# Altium PCB PCB_WallSwitch_TOP.PcbDoc
Units mm, origin at the board's own origin, x right, y up, seen from the top; angles counter-clockwise.
Board outline 70 x 47 mm, 2 copper layers (Top Layer, Bottom Layer), stack 1.67 mm thick; 28 components, 35 nets, 137 pads, 14 vias.
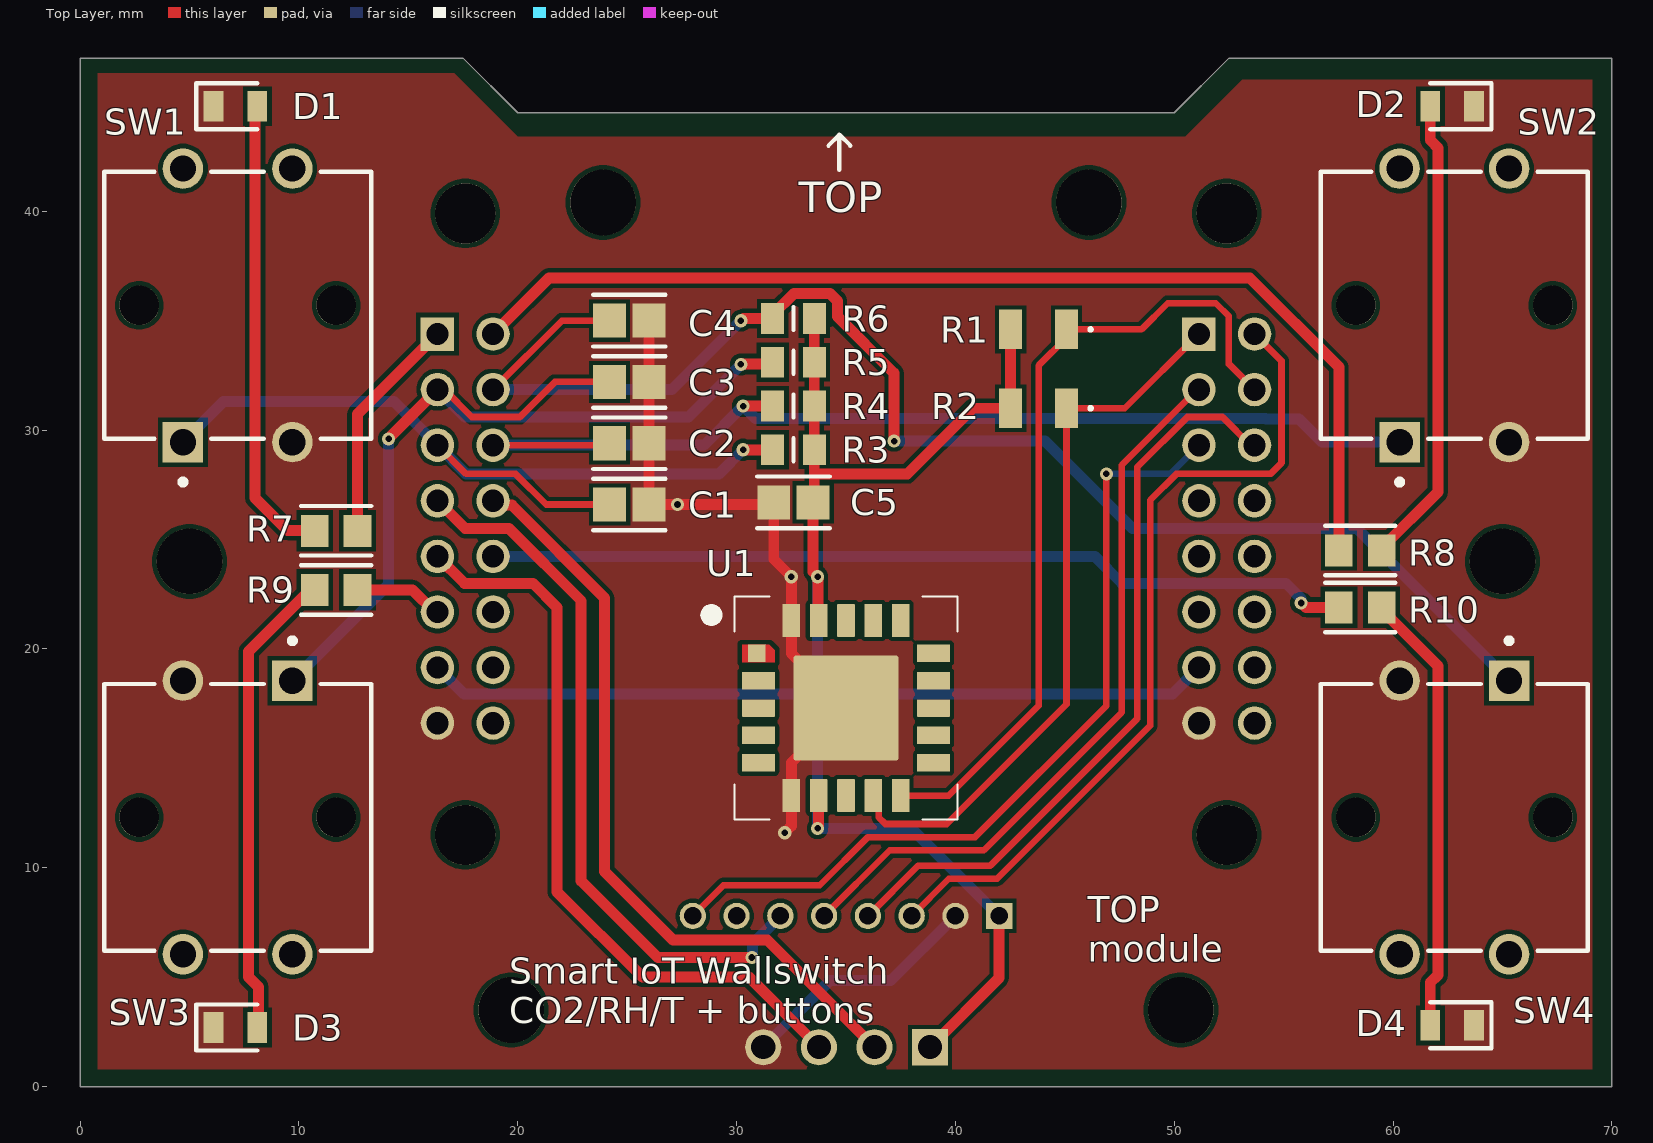
[diagram p0: Top Layer view]
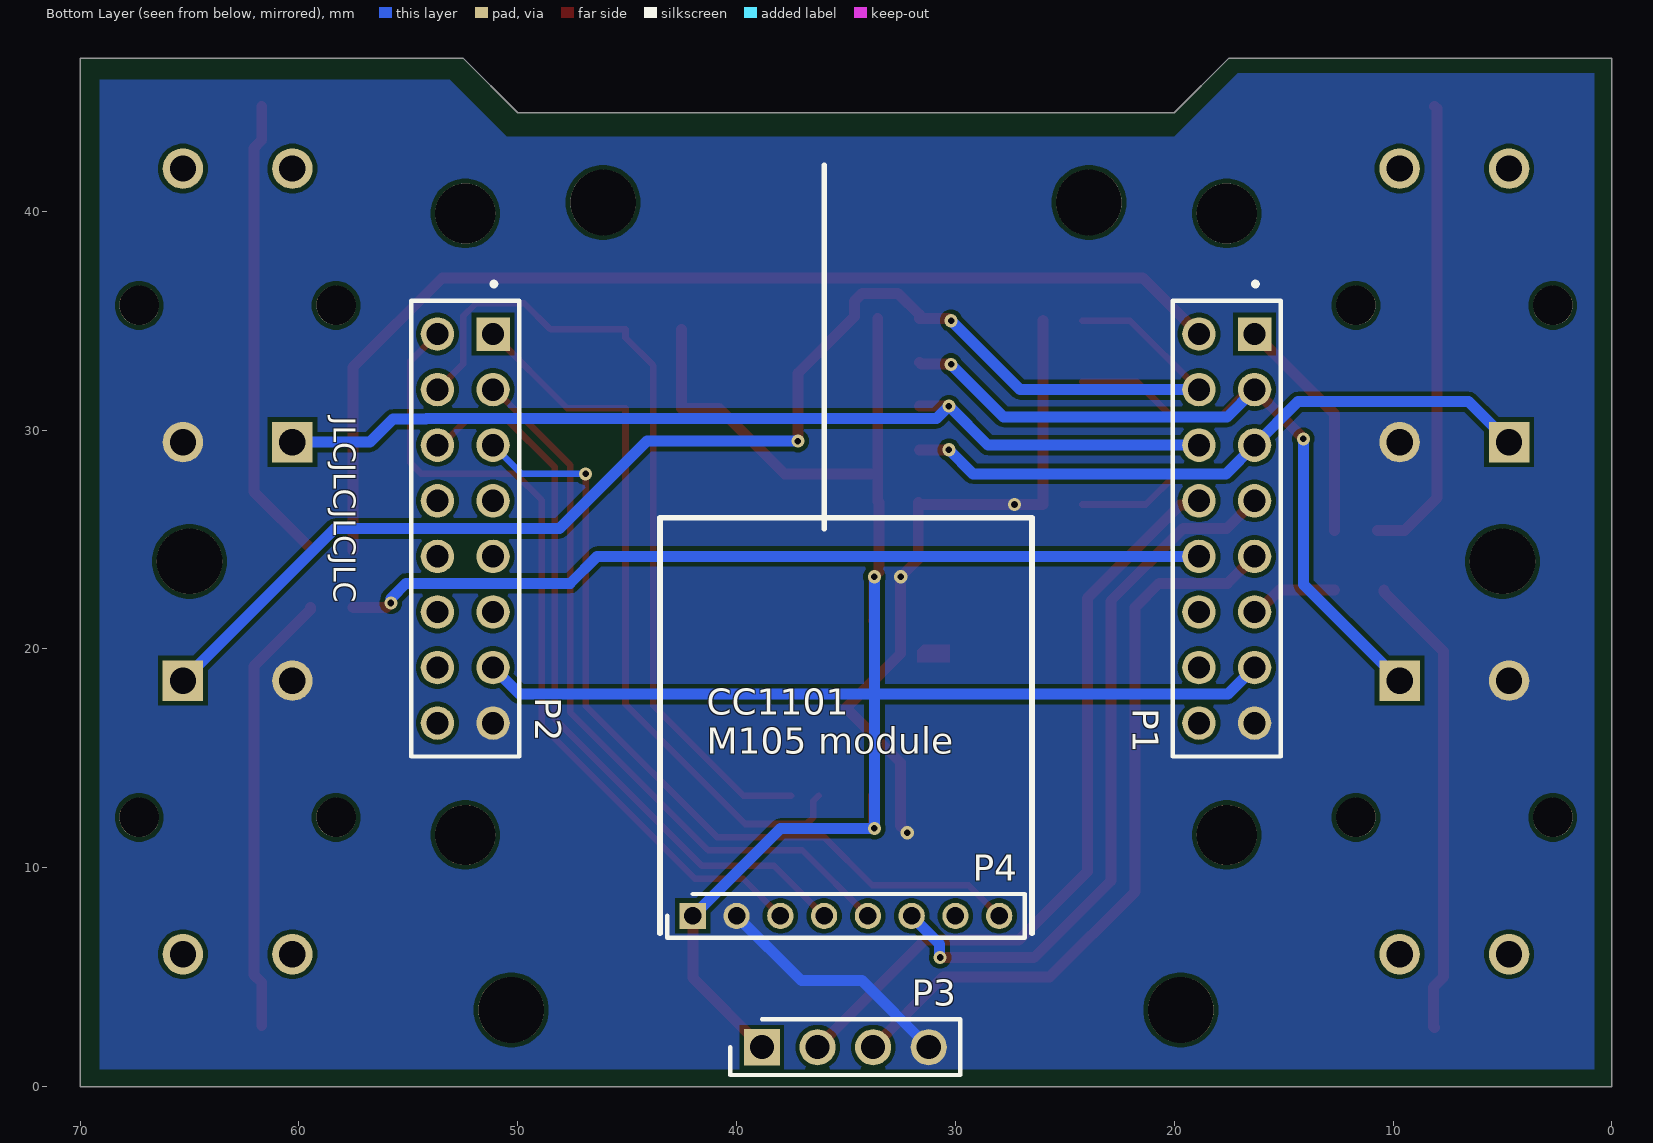
[diagram p1: Bottom Layer view, seen from below]
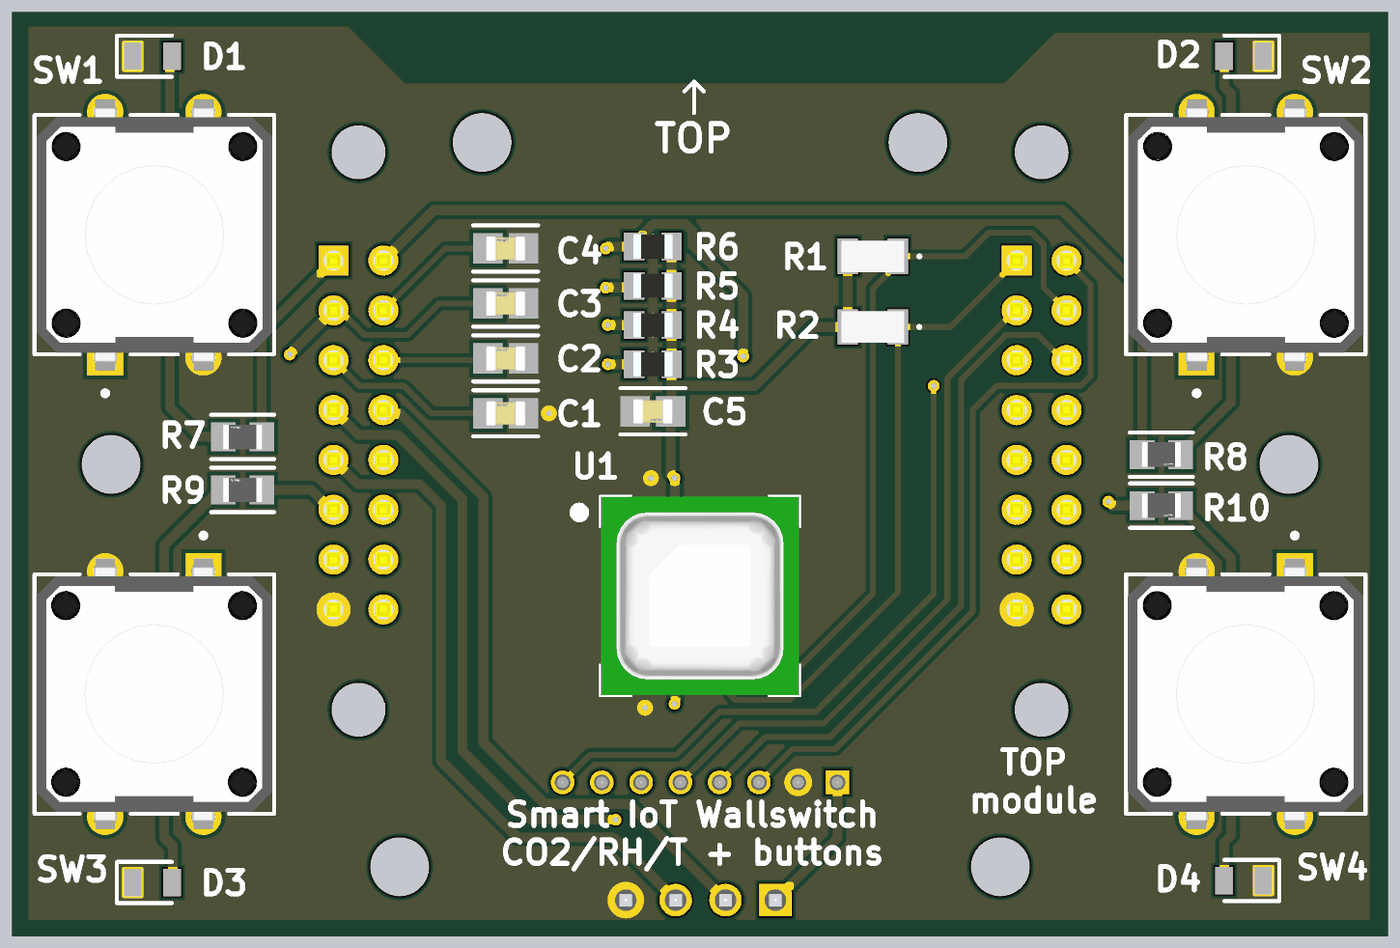
[diagram p2: 3D render of the assembled board from above, using the file's embedded part models]
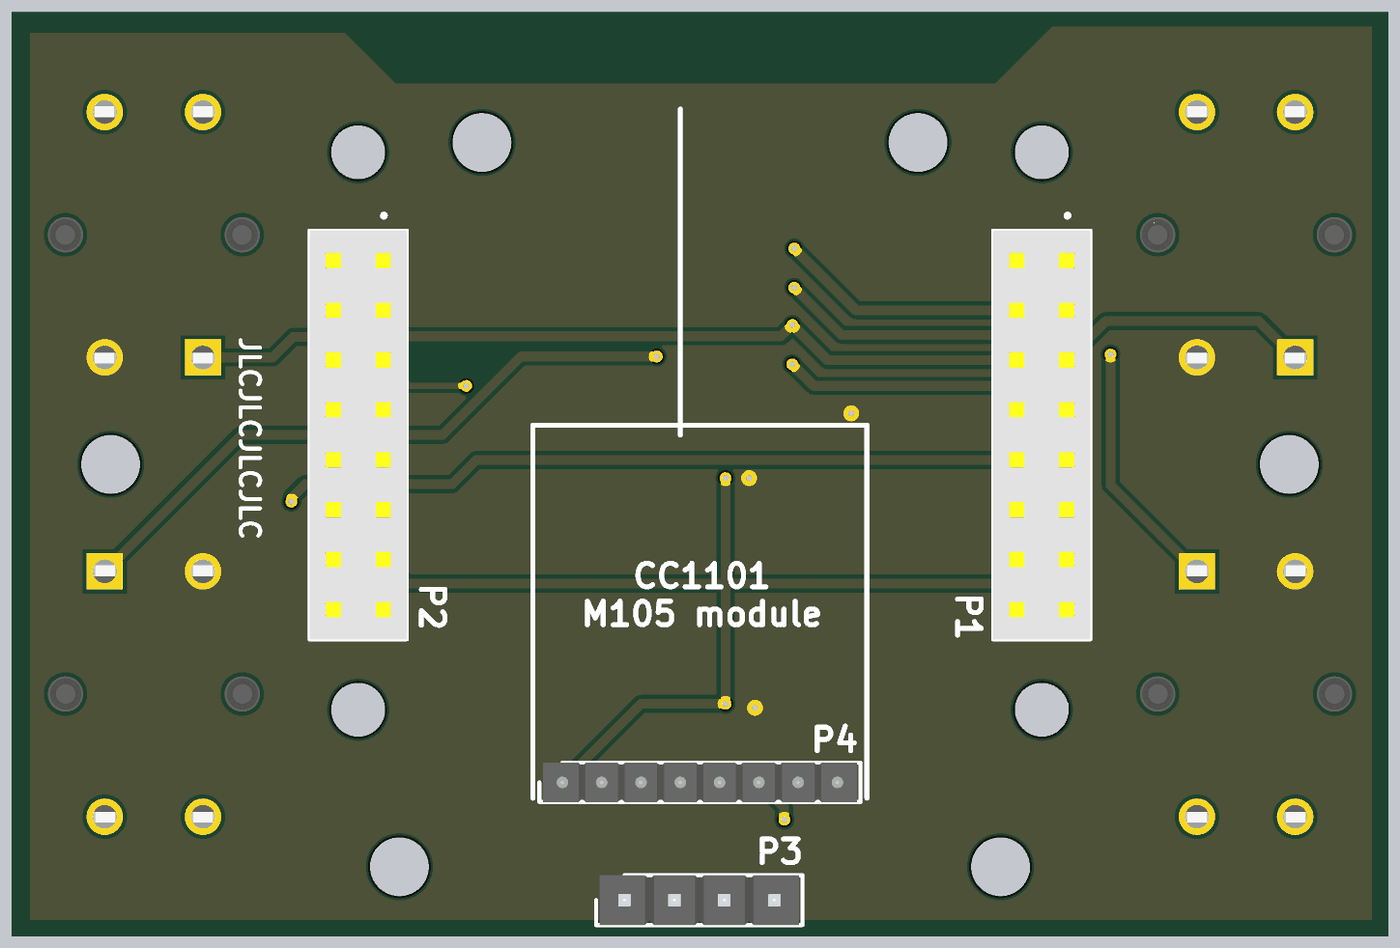
[diagram p3: 3D render of the assembled board from below, using the file's embedded part models]

## Layer stack, top to bottom
Top Solder: solder mask 0.0102, Solder Resist, Dk 3.5
Top Layer: signal copper 0.035
Dielectric 1: dielectric 1.6, FR-4, Dk 4.8
Bottom Layer: signal copper 0.035
Bottom Solder: solder mask 0.0102, Solder Resist, Dk 3.5

## Board outline
0,0 0,47 17.5,47 20,44.5 50,44.5 52.5,47 70,47 70,0

## Design rules (kind name [scope] priority, off if disabled: settings)
BoardOutlineClearance [All] p1: gap=0.2 ignorepadtopadclearanceinfootprint=FALSE except(0.4: Arc-SplitBarrior Arc-SplitContinuation Track-SplitBarrior Track-SplitContinuation SMDPad-SplitBarrior SMDPad-SplitContinuation THPad-SplitBarrior THPad-SplitContinuation Via-SplitBarrior Via-SplitContinuation Fill-SplitBarrior Fill-SplitContinuation Poly-SplitBarrior Poly-SplitContinuation Region-SplitBarrior Region-SplitContinuation Text-SplitBarrior Text-SplitContinuation)
Clearance "Clearance Bottom Layer" [OnLayer('Bottom Layer')] p1: gap=0.2 ignorepadtopadclearanceinfootprint=TRUE except(0.254: Arc-Text Track-Text SMDPad-Text THPad-Text Via-Text Fill-Text Poly-Text Region-Text Text-Text)
Clearance "Clearance Top Layer" [OnLayer('Top Layer')] p2: gap=0.2 ignorepadtopadclearanceinfootprint=TRUE except(0.254: Arc-Text Track-Text SMDPad-Text THPad-Text Via-Text Fill-Text Poly-Text Region-Text Text-Text)
Clearance [All] p3: gap=0.2 ignorepadtopadclearanceinfootprint=FALSE except(0.089: Arc-Arc Arc-Track Arc-SMDPad Track-Track Track-SMDPad SMDPad-SMDPad; 0.127: Arc-Via Track-Via SMDPad-Via THPad-Via Via-Via; 0.254: Arc-Text Track-Text SMDPad-Text THPad-Text Via-Text Fill-Text Poly-Text Region-Text Text-Text)
HoleSize [All] p1: absolutevalues=TRUE maxlimit=6.3 minlimit=0.2 maxpercent=80.000 minpercent=20.000
MinimumAnnularRing [All] p1: minimumring=0.076
MinimumSolderMaskSliver [All] p1: minsoldermaskwidth=0.1
PlaneConnect [All] p1: planeconnectstyle=Direct reliefexpansion=0.508 reliefentries=4 reliefconductorwidth=0.254 reliefairgap=0.254
PolygonConnect PolygonConnect_1 [All] p1: connectstyle=Direct reliefconductorwidth=0.508 reliefentries=4 polygonreliefangle="90 Angle" airgapwidth=0.254
RoutingCorners [All] p1: cornerstyle=Round minsetback=2.54 maxsetback=2.54
RoutingVias [All] p1: holewidth=0.5 width=1 viastyle="Through Hole" minholewidth=0.2 minwidth=0.45 maxholewidth=1 maxwidth=2
SilkToSilkClearance [All] p1: silktosilkclearance=0.1
SilkToSolderMaskClearance [IsPad] p1: minsilkscreentomaskgap=0.1 clearancetoexposedcopper=TRUE
SolderMaskExpansion [All] p1: expansion=0.102 istentingtop=FALSE
Width [All] p1: maxlimit=2.54 minlimit=0.089 preferedwidth=0.381
24 further rules are at their usual default settings.

## Components (designator, comment, footprint, x,y, rotation, side; value= is the part's Value field where it differs from the comment)
C1 "C0805C104K5RAC7411" FP-C0805C-DN-IPC_A 25.101,26.6 r0 top
C2 "C0805C104K5RAC7411" FP-C0805C-DN-IPC_A 25.1,29.4 r0 top
C3 "C0805C104K5RAC7411" FP-C0805C-DN-IPC_A 25.1,32.2 r0 top
C4 "C0805C104K5RAC7411" FP-C0805C-DN-IPC_A 25.1,35 r0 top
C5 "C0805C104K5RAC7411" FP-C0805C-DN-IPC_A 32.6,26.7 r180 top
D1 "IN-S85AT5B" LEDC2012X110N 7.1,44.8 r0 top
D2 "IN-S85AT5B" LEDC2012X110N 62.7,44.8 r180 top
D3 "IN-S85AT5B" LEDC2012X110N 7.1,2.7 r0 top
D4 "IN-S85AT5B" LEDC2012X110N 62.7,2.8 r180 top
P1 "SSQ-108-01-T-D" SAMTEC_SSQ-108-XX-X-D 17.6,25.5 r90 bottom
P2 "SSQ-108-01-T-D" SAMTEC_SSQ-108-XX-X-D 52.4,25.5 r90 bottom
P3 "M20-9770446" HDRV4W64P0X254_1X4_1016X254X834P 38.84,1.8 r180 bottom
P4 "M22-2010805" HDRV8W60P0X200_1X8_1600X200X525P 42,7.8 r180 bottom
R1 "RCC12062K20FKEA" RCC1206_e3 43.8,34.6 r180 top
R2 "RCC12062K20FKEA" RCC1206_e3 43.8,31 r180 top
R3 "ERJ-UP6J103V" RESC2012X70N 32.6,29.1 r180 top
R4 "ERJ-UP6J103V" RESC2012X70N 32.6,31.1 r180 top
R5 "ERJ-UP6J103V" RESC2012X70N 32.6,33.1 r180 top
R6 "ERJ-UP6J103V" RESC2012X70N 32.6,35.1 r180 top
R7 "ESR10EZPJ820" FP-ESR10-IPC_A 11.7,25.4 r0 top
R8 "ESR10EZPJ820" FP-ESR10-IPC_A 58.5,24.5 r180 top
R9 "ESR10EZPJ820" FP-ESR10-IPC_A 11.7,22.7 r0 top
R10 "ESR10EZPJ820" FP-ESR10-IPC_A 58.5,21.9 r180 top
SW1 "B3F-4000" FP-B3F-4000-MFG 7.2,35.7 r90 top
SW2 "B3F-4000" FP-B3F-4000-MFG 62.8,35.7 r90 top
SW3 "B3F-4000" FP-B3F-4000-MFG 7.2,12.3 r270 top
SW4 "B3F-4000" FP-B3F-4000-MFG 62.8,12.3 r270 top
U1 "SCD40-D-R2" SCD4x 35,17.3 r0 top

## Footprints (in the part's own frame and the unit in brackets; to place one, negate y for a bottom-side part, rotate by r counter-clockwise, add the part's x,y. Pads: shape width x height; smd on the part's side, far side on the other; paste and mask are expansions set on the pad)
FP-B3F-4000-MFG [mm]
  rect 1.85x1.85 hole 1.2 paste-1000 mask+0: 1(-6.25,2.5)
  round 1.85 hole 1.2 paste-1000 mask+0: 2(6.25,2.5) 3(-6.25,-2.5) 4(6.25,-2.5)
  round 1.8 hole 1.8 unplated paste-1000 mask+0: ""(0,4.5) ""(0,-4.5)
  silkscreen extent -8.2,-6.1 6.1,6.1, body extent -7.27,-6.2 7.27,6.2, height 0.25
FP-C0805C-DN-IPC_A [mm]
  rect 1.505x1.556 smd paste+0 mask+0: 1(-0.901,0) 2(0.901,0)
  silkscreen extent -1.65,-1.18 1.65,1.18, body extent -2.15,-1.28 2.15,1.28, height 0.25
FP-ESR10-IPC_A [mm]
  rect 1.258x1.462 smd paste+0 mask+0: 1(-0.977,0) 2(0.977,0)
  silkscreen extent -1.61,-1.13 1.61,1.13, body extent -2.11,-1.23 2.11,1.23, height 0.25
HDRV4W64P0X254_1X4_1016X254X834P [mm]
  rect 1.65x1.65 hole 1.1: 1(0,0)
  round 1.65 hole 1.1: 2(2.54,0) 3(5.08,0) 4(7.62,0)
  silkscreen extent -1.45,-1.27 9.07,1.27, body extent -1.27,-1.27 8.89,1.27, height 8.34
HDRV8W60P0X200_1X8_1600X200X525P [mm]
  rect 1.2x1.2 hole 0.8: 1(0,0)
  round 1.2 hole 0.8: 2(2,0) 3(4,0) 4(6,0) 5(8,0) 6(10,0) 7(12,0) 8(14,0)
  silkscreen extent -1.17,-1 15.17,1, body extent -1,-1 15,1, height 5.25
LEDC2012X110N [mm]
  rect 0.9x1.4 smd: 1(-1,0) 2(1,0)
  silkscreen extent -1.8,-1.05 1,1.05
RCC1206_e3 [mm]
  rect 1.05x1.8 smd: 1(-1.275,0) 2(1.275,0)
  silkscreen extent -2.42,-0.05 -2.33,0.05, body extent -1.6,-0.8 1.6,0.8, height 0.55
RESC2012X70N [mm]
  rect 1.05x1.4 smd: 1(-0.95,0) 2(0.95,0)
  silkscreen extent 0,-0.53 0,0.53, body extent -1,-0.63 1,0.63, height 0.7
SAMTEC_SSQ-108-XX-X-D [mm]
  rect 1.53x1.53 hole 1.02: 01(8.89,-1.27)
  round 1.53 hole 1.02: 02(8.89,1.27) 03(6.35,-1.27) 04(6.35,1.27) 05(3.81,-1.27) 06(3.81,1.27) 07(1.27,-1.27) 08(1.27,1.27) 09(-1.27,-1.27) 10(-1.27,1.27) 11(-3.81,-1.27) 12(-3.81,1.27) 13(-6.35,-1.27) 14(-6.35,1.27) 15(-8.89,-1.27) 16(-8.89,1.27)
  silkscreen extent -10.42,-2.47 11.27,2.47, body extent -10.41,-2.48 10.41,2.48, height 8.51
SCD4x [mm] "PQFN, 20-Leads, Body 10.10x10.10mm, Pitch 1.25mm, Thermal Pad 4.80x4.80mm, IPC Medium Density"
  rect 0.8x0.8 smd paste-0.7: 1(-4.075,2.5)
  rrect5% 1.5x0.8 smd paste-0.125: 2(-4,1.25) 3(-4,0) 4(-4,-1.25) 5(-4,-2.5) 11(4,-2.5) 12(4,-1.25) 13(4,0) 14(4,1.25) 15(4,2.5)
  rrect5% 0.8x1.5 smd paste-0.125: 6(-2.5,-4) 7(-1.25,-4) 8(0,-4) 9(1.25,-4) 10(2.5,-4) 16(2.5,4) 17(1.25,4) 18(0,4) 19(-1.25,4) 20(-2.5,4)
  rrect5% 4.8x4.8 smd paste-5 mask+0.1: 21(0,0)
  Top Layer region: -4.75,2.1 -4.75,2.9 -3.5,2.9 -3.25,2.65 -3.25,2.1
  silkscreen extent -6.65,-5.1 5.1,5.1, body extent -5.05,-5.05 5.05,5.05, height 6.28

## Part data
C1 C2 C3 C4 C5: "Cap Ceramic 0.1uF 50V X7R 10% SMD 0805 125°C Paper T/R", Capacitance=100nF, Case/Package=0805, Dielectric=X7R, Dielectric Material=Ceramic, Manufacturer=KEMET, Max Operating Temperature=125°C, Min Operating Temperature=-55°C, Supplier Part Number 1=80-C0805C104K5RACLR, Tolerance=10%, Voltage Rating (DC)=50V, Category="Ceramic Capacitors", ComponentLink1Description=http://components.arrow.com/part/dataview/30748302S8994022N7429?src-supplier=Arrow+Electronics, ComponentLink1URL=http://components.arrow.com/part/dataview/30748302S8994022N7429?src-supplier=Arrow+Electronics, ComponentLink2Description=https://www.verical.com/server-webapp/html/getDatasheet?partID=248513&src-supplier=Verical, ComponentLink2URL=https://www.verical.com/server-webapp/html/getDatasheet?partID=248513&src-supplier=Verical, Construction=Flat, Depth=1.25mm, Height=0.9mm, Length=2mm, Manufacturer Part Number=C0805C104K5RAC7411, Mount="Surface Mount", Packaging="Tape and Reel", Pricing 1="1=0,13000, 10=0,09300, 50=0,09300, 100=0,04400, 500=0,03100, 1000=0,02600, 2500=0,02400, 5000=0,02200, 10000=0,02100, 15000=0,02000 (USD)", Radiation Hardening=No, RoHS=Yes, RoHS Compliant=Yes, Stock 1=1484324, Supplier 1=Mouser
D1 D2 D3 D4: "Led Blue Clear 0805 SMD", Case Code (Imperial)=0805, Case Code (Metric)=2012, Color=Blue, Forward Voltage=3V, Lens Color=Clear, Manufacturer=Inolux, Supplier Part Number 1=743-IN-S85AT5B, Test Current=5mA, Case/Package=0805, Category=LEDs, ComponentLink1Description=http://www.inolux-corp.com/datasheet/SMDLED/Mono%20Color%20Top%20View/IN-S85AT%20Series_V1.0.pdf?src-supplier=Digi-Key, ComponentLink1URL=http://www.inolux-corp.com/datasheet/SMDLED/Mono%20Color%20Top%20View/IN-S85AT%20Series_V1.0.pdf?src-supplier=Digi-Key, Dominant Wavelength=470nm, Height=1.1mm, Length=2mm, Lens Size=1.25mm, Lens Style=Flat, Lens Transparency=Clear, Luminous Intensity=80mcd, Manufacturer Part Number=IN-S85AT5B, Mount="Surface Mount", Packaging="Tape and Reel", Pricing 1="1=0,37000, 10=0,20100, 50=0,20100, 100=0,09300, 1000=0,06800, 10000=0,05100 (USD)", RoHS=No, Stock 1=32542, Supplier 1=Mouser, Viewing Angle=120°, Width=1.25mm
P1 P2: "Headers & Wire Housings Tiger Buy Socket Strip with Square Tails, 0.100 Pitch", Color=Black, Contact Resistance=10mR, Manufacturer=Samtec, Max Current Rating=7.6A, Max Operating Temperature=105°C, Max Voltage Rating (AC)=550V, Min Operating Temperature=-55°C, Supplier Part Number 1=200-SSQ10801TD, Category="Headers and Wire Housings", ComponentLink1Description=https://datasheet.ciiva.com/748/ssq-1xx-xx-xxx-x-xx-xxx-xx-x-mkt-748536.pdf?src-supplier=Digi-Key, ComponentLink1URL=https://datasheet.ciiva.com/748/ssq-1xx-xx-xxx-x-xx-xxx-xx-x-mkt-748536.pdf?src-supplier=Digi-Key, Connector Type=Receptacle, Contact Material=Bronze, Contact Plating=Tin,Matte, Contact Type="Female Socket", Depth=4.95mm, Gender=Female, Housing Color=Black, Housing Material=Polymer, Lead Free="Lead Free", Length=20.83mm, Manufacturer Part Number=SSQ-108-01-T-D, Mount="Through Hole", Number of Contacts=16, Number of Positions=16, Number of Rows=2, Orientation=Straight, Packaging=Bulk, Pitch=2.54mm, Pricing 1="1=2,40000, 10=2,18000, 50=2,18000, 100=1,86000, 500=1,55000, 1000=1,33000, 2500=1,23000, 5000=1,18000, 10000=1,15000, 25000=1,12000 (USD)", RoHS=Yes, RoHS Compliant=Yes, Row Spacing=0.1inch, Series=SSQ, Stock 1=1213, Supplier 1=Mouser, Termination=Solder, Width=4.95mm
P3: "04 SIL VERT PIN HDR", Case/Package=SIL, Color=Black, Contact Resistance=30mR, Current Rating=3A, Manufacturer=Harwin, Max Operating Temperature=105°C, Min Operating Temperature=-40°C, Package Quantity=1000, Supplier Part Number 1=855-M20-9770446, Voltage Rating=750V, Category="Headers and Wire Housings", ComponentLink1Description=https://datasheet.ciiva.com/6832/m20-977-6832936.pdf?src-supplier=Digi-Key, ComponentLink1URL=https://datasheet.ciiva.com/6832/m20-977-6832936.pdf?src-supplier=Digi-Key, Connector Type="Male Pin", Contact Material=Brass, Contact Mating Length=0.228inch, Contact Plating=Tin, Depth=2.54mm, Gender=Male, Housing Color=Black, Housing Material=Nylon, Length=10.16mm, Manufacturer Part Number=M20-9770446, Max Current Rating=3A, Mount="Through Hole", Number of Contacts=4, Number of Positions=4, Number of Rows=1, Orientation=Straight, Packaging=Bulk, Pitch=2.54mm, Pricing 1="1=0,20000, 10=0,15300, 50=0,15300, 100=0,12500, 500=0,11300, 1000=0,09100, 2000=0,08100, 10000=0,07300, 25000=0,06800, 50000=0,06600 (USD)", RoHS=Yes, Stock 1=20888, Supplier 1=Mouser, Termination=Solder
P4: "Connector, Header, 8Pos, 1Row, 2Mm Rohs Compliant: Yes", Case/Package=SIL, Color=Black, Contact Resistance=20mR, Current Rating=1A, Flammability Rating="UL94 V-0", Insulation Resistance=10GR, Manufacturer=Harwin, Max Operating Temperature=105°C, Min Operating Temperature=-55°C, Package Quantity=1000, Supplier Part Number 1=855-M22-2010805, Voltage Rating=650V, Category="Headers and Wire Housings", ComponentLink1Description=https://datasheet.ciiva.com/11751/0900766b800345c0-11751285.pdf?src-supplier=RSComponents, ComponentLink1URL=https://datasheet.ciiva.com/11751/0900766b800345c0-11751285.pdf?src-supplier=RSComponents, ComponentLink2Description=https://datasheet.ciiva.com/9479/m22-201-9479493.pdf?src-supplier=Avnet, ComponentLink2URL=https://datasheet.ciiva.com/9479/m22-201-9479493.pdf?src-supplier=Avnet, ComponentLink3Description=https://datasheet.ciiva.com/6814/m22-201-6814953.pdf?src-supplier=Digi-Key, ComponentLink3URL=https://datasheet.ciiva.com/6814/m22-201-6814953.pdf?src-supplier=Digi-Key, Connector Type="Male Pin", Contact Material=Bronze, Contact Mating Length=0.138inch, Contact Plating=Gold, Contact Type="Male Pin", Depth=2mm, Housing Color=Black, Housing Material=Nylon, Length=16mm, Manufacturer Part Number=M22-2010805, Max Current Rating=1A, Mount="Through Hole", Number of Contacts=8, Number of Positions=8, Number of Rows=1, Orientation=Straight, Packaging=Bulk, Pitch=2mm, Pricing 1="1=0,57000, 10=0,44500, 50=0,44500, 100=0,38500, 1000=0,28800, 10000=0,23600 (USD)", Radiation Hardening=No, REACH SVHC="No SVHC", RoHS=Yes, RoHS Compliant=Yes, Series=M22, Stock 1=686, Supplier 1=Mouser, Termination=Solder
R1 R2: "Res, Aec-Q200, 2K2, 1%, 0.5W, 1206 Rohs Compliant: Yes", Manufacturer=Vishay, Resistance=2.2k, Supplier Part Number 1=71-RCC12062K20FKEA, Category="Chip SMD Resistors", Manufacturer Part Number=RCC12062K20FKEA, Pricing 1="1=0,32000, 10=0,27600, 50=0,27600, 100=0,10800, 250=0,10700, 1000=0,04500, 5000=0,04300, 10000=0,04300 (USD)", RoHS=No, Stock 1=10157, Supplier 1=Mouser
R3 R4 R5 R6: "Res 10K Ohm 5% 1/2W 0805", Manufacturer=Panasonic, Resistance=10K, Supplier Part Number 1=667-ERJ-UP6J103V, Category="Chip SMD Resistors", Manufacturer Part Number=ERJ-UP6J103V, Pricing 1="1=0,16000, 10=0,11900, 50=0,11900, 100=0,05800, 1000=0,02500, 10000=0,02100 (USD)", RoHS=No, Stock 1=46150, Supplier 1=Mouser
R7 R8 R9 R10: "Res Thick Film 0805 82 Ohm 5% 0.4W ±200ppm/C Epoxy Resin Pad SMD Automotive T/R", Case Code (Imperial)=0805, Case Code (Metric)=2012, Manufacturer=Rohm, Max Power Dissipation=400mW, Power Rating=250mW, Resistance=82R, Supplier Part Number 1=755-ESR10EZPJ820, Temperature Coefficient=200ppm/°C, Tolerance=5%, Case/Package=0805, Category="Chip SMD Resistors", ComponentLink1Description=https://datasheet.ciiva.com/2468/esr-2468944.pdf?src-supplier=Digi-Key, ComponentLink1URL=https://datasheet.ciiva.com/2468/esr-2468944.pdf?src-supplier=Digi-Key, ComponentLink2Description=https://datasheet.ciiva.com/16439/esr10ezpd-16439950.pdf?src-supplier=Future+Electronics, ComponentLink2URL=https://datasheet.ciiva.com/16439/esr10ezpd-16439950.pdf?src-supplier=Future+Electronics, Features="Automotive AEC-Q200", Lead Free="Lead Free", Manufacturer Part Number=ESR10EZPJ820, Number of Terminations=2, Packaging="Cut Tape", Pricing 1="1=0,10000, 10=0,08600, 50=0,08600, 100=0,03300, 1000=0,01500, 10000=0,01100 (USD)", RoHS=Yes, RoHS Compliant=Yes, Series=ESR, Size Code=0805, Stock 1=16946, Supplier 1=Mouser
SW1 SW2 SW3 SW4: "SWITCH TACTILE SPST-NO 0.05A 24V", Manufacturer=Omron, Supplier Part Number 1=653-B3F-4000, Category="Tactile Switches", ComponentLink1Description=https://datasheet.ciiva.com/1634/611570-1634130.pdf?src-supplier=Farnell, ComponentLink1URL=https://datasheet.ciiva.com/1634/611570-1634130.pdf?src-supplier=Farnell, ComponentLink2Description=https://datasheet.ciiva.com/2900/b3f-0811-2900015.pdf?src-supplier=Digi-Key, ComponentLink2URL=https://datasheet.ciiva.com/2900/b3f-0811-2900015.pdf?src-supplier=Digi-Key, ComponentLink3Description=https://datasheet.ciiva.com/5283/b3f-0811-26083-5283451.pdf?src-supplier=Mouser, ComponentLink3URL=https://datasheet.ciiva.com/5283/b3f-0811-26083-5283451.pdf?src-supplier=Mouser, ComponentLink4Description=https://datasheet.ciiva.com/14142/b3f-eng-datasheet-14142463.pdf?src-supplier=Distrelec, ComponentLink4URL=https://datasheet.ciiva.com/14142/b3f-eng-datasheet-14142463.pdf?src-supplier=Distrelec, ComponentLink5Description=https://datasheet.ciiva.com/14540/70175371-14540890.pdf?src-supplier=Allied+Electronics, ComponentLink5URL=https://datasheet.ciiva.com/14540/70175371-14540890.pdf?src-supplier=Allied+Electronics, ComponentLink6Description=https://datasheet.ciiva.com/16154/en-b3f-16154927.pdf?src-supplier=Onlinecomponents.com, ComponentLink6URL=https://datasheet.ciiva.com/16154/en-b3f-16154927.pdf?src-supplier=Onlinecomponents.com, ComponentLink7Description=https://datasheet.ciiva.com/30093/en-b3f-30093919.pdf?src-supplier=Onlinecomponents.com, ComponentLink7URL=https://datasheet.ciiva.com/30093/en-b3f-30093919.pdf?src-supplier=Onlinecomponents.com, ComponentLink8Description=https://datasheet.ciiva.com/15183/getdatasheetpartid-388869-15183799.pdf?src-supplier=Verical, ComponentLink8URL=https://datasheet.ciiva.com/15183/getdatasheetpartid-388869-15183799.pdf?src-supplier=Verical, ComponentLink9Description=https://datasheet.ciiva.com/1532/en-b3f-1532558.pdf?src-supplier=Element14, ComponentLink9URL=https://datasheet.ciiva.com/1532/en-b3f-1532558.pdf?src-supplier=Element14, ComponentLink10Description=https://datasheet.ciiva.com/1532/1686088-1532559.pdf?src-supplier=Element14, ComponentLink10URL=https://datasheet.ciiva.com/1532/1686088-1532559.pdf?src-supplier=Element14, ComponentLink11Description=https://datasheet.ciiva.com/1532/611570-1532593.pdf?src-supplier=Element14, ComponentLink11URL=https://datasheet.ciiva.com/1532/611570-1532593.pdf?src-supplier=Element14, Manufacturer Part Number=B3F-4000, Pricing 1="1=0,54000, 10=0,52700, 50=0,50300, 100=0,43600, 1000=0,33000, 10000=0,32000 (USD)", RoHS=Yes, Stock 1=3308, Supplier 1=Mouser
U1: "SCD40-D-R2 CO2 Sensor I2C, SMD ToR 600 pcs", Manufacturer=Sensirion, Supplier Part Number 1=403-SCD40-D-R2, Manufacturer Part Number=SCD40-D-R2, Pricing 1="1=38,78000, 10=33,50000, 50=27,33000, 100=26,45000, 1000=24,69000, 10000=24,69000 (USD)", RoHS=Yes, Stock 1=1625, Supplier 1=Mouser

## Free pads (board coordinates)
  round 3 hole 3 unplated: MH3(5,24) MH3(19.7,3.5) MH3(23.9,40.4) MH3(46.1,40.4) MH3(50.3,3.5) MH3(65,24)
  round 2.75 hole 2.75 unplated: MH3(17.6,11.5) MH3(17.6,39.9) MH3(52.4,11.5) MH3(52.4,39.9)

## Via types
v1: diameter 0.6, hole 0.3, Top Layer to Bottom Layer, 14 vias

## Nets (pads, with @x,y where several pads share a name; then routed paths per layer and width w, separated by ;. In a path a pad name is that pad's centre, name@x,y a point inside that pad or via, vN(x,y) a via of type N, cw(c..) or ccw(c..) an arc to the next point about the centre after c; other vN are vias at no path point)
3V3: C5.1 P1.13 P2.13 P3.1 P4.1 R1.2 R2.2 R3.1 R4.1 R5.1 R6.1 U1.7 U1.19 | length 93.9
  Top Layer w0.5: R6.1 R5.1 R4.1 R3.1 33.55,27.925 ; v1(33.7,11.8) 33.7,11.827 33.75,11.877 U1.7 ; U1.19 33.719,21.331 33.719,23.281 v1(33.7,23.3) 33.7,23.327 33.501,23.526 C5.1 33.55,26.749 33.55,27.925 ; P3.1 42,4.96 P4.1 ; R1.2 R2.2 40.8,31 37.8,28 33.625,28 33.55,27.925
  Bottom Layer w0.5: P1.13 17.545,17.935 33.7,17.935 ; v1(33.7,23.3) 33.7,17.935 ; P4.1 38,11.8 v1(33.7,11.8) 33.7,17.935 ; P2.13 49.915,17.935 33.7,17.935
5V: P1.14
5V_P2: P2.14
5VEXT: P1.16
5VEXT_P2: P2.16
GDO0: P4.7
GDO2: P1.07 P4.6 | length 33
  Top Layer w0.5: P1.07 17.6,25.5 19.6,25.5 22.9,22.2 22.9,9.4 26.4,5.9 v1(30.7,5.9)
  Bottom Layer w0.5: v1(30.7,5.9) 30.719,5.919 30.719,6.519 P4.6
GND: C1.2 C2.2 C3.2 C4.2 C5.2 D1.1 D2.1 D3.1 D4.1 P1.15 P2.15 P3.4 P4.2 SW1.3 SW2.3 SW3.3 SW4.3 U1.6 U1.20 U1.21 | length 43
  Top Layer w0.5: C2.2@26.002,29.399 C1.2 v1(27.3,26.6) 31.599,26.6 C5.2 31.699,24.101 v1(32.5,23.3) U1.20 32.5,19.8 U1.21 32.5,14.8 U1.6 32.5,11.9 v1(32.2,11.6) ; C2.2 C3.2 C4.2
  Bottom Layer w0.5: P3.4 34.263,4.843 37.043,4.843 P4.2
GPIO2: P2.12
GPIO4: P2.10
GPIO12: P1.11 R9.2 | length 4.1
  Top Layer w0.5: R9.2 15.197,22.7 16.207,21.69 P1.11
GPIO13: P1.12
GPIO14: P1.10 R10.2 | length 39.7
  Top Layer w0.5: v1(55.8,22.1) 55.827,22.1 56.027,21.9 R10.2
  Bottom Layer w0.5: P1.10 46.37,24.23 47.6,23 55.1,23 55.8,22.3 v1(55.8,22.1)
GPIO15: P2.11
GPIO16: P2.07
GPIO17: P2.08
GPIO21: P2.04 R1.1 U1.10 | length 37.7
  Top Layer w0.3: U1.10 39.7,13.3 43.8,17.4 43.8,32.95 45.075,34.225 R1.1 48.5,34.6 49.7,35.8 51.9,35.8 52.5,35.2 52.5,33.02 P2.04
GPIO22: P2.01 R2.1 U1.9 | length 33.1
  Top Layer w0.3: U1.9 36.5,13.05 36.5,12.3 36.8,12 39.6,12 45.075,17.475 R2.1 47.74,31 P2.01
GPIO26: P1.08 P3.2 | length 35.1
  Top Layer w0.5: P1.08 19.067,26.573 19.727,26.573 23.969,22.331 23.969,9.831 27.1,6.7 31.4,6.7 P3.2
GPIO27: P1.09 P3.3 | length 34.3
  Top Layer w0.5: P1.09 17.56,23 20.7,23 21.8,21.9 21.8,8.9 25.7,5 30.56,5 P3.3
GPIO32: C1.1 P1.05 R3.2 SW1.1 | length 38.5
  Top Layer w0.3: P1.05 17.64,28 19.9,28 21.3,26.6 C1.1
  Top Layer w0.5: v1(30.3,29.1) R3.2
  Bottom Layer w0.5: SW1.1 6.55,31.3 14.34,31.3 P1.05 17.64,28 29.2,28 v1(30.3,29.1)
GPIO33: C2.1 P1.06 R4.2 SW2.1 | length 49.6
  Top Layer w0.3: P1.06 24.109,29.31 C2.1
  Top Layer w0.5: v1(30.3,31.1) R4.2
  Bottom Layer w0.5: P1.06 28.51,29.31 v1(30.3,31.1) 30.872,30.528 54.175,30.528 54.203,30.5 55.7,30.5 56.75,29.45 SW2.1
GPIO34: C3.1 P1.03 R5.2 SW3.1 | length 42.7
  Top Layer w0.3: P1.03 16.65,31.85 17.9,30.6 20.1,30.6 21.7,32.2 C3.1
  Top Layer w0.5: SW3.1@9.2,19.05 SW3.1 ; v1(14.1,29.6) 14.1,29.62 P1.03 ; v1(30.2,33) 30.219,33.019 31.569,33.019 R5.2
  Bottom Layer w0.5: SW3.1 14.1,22.95 v1(14.1,29.6) ; P1.03 17.58,30.6 27.8,30.6 v1(30.2,33)
GPIO35: C4.1 P1.04 R6.2 SW4.1 | length 64.6
  Top Layer w0.3: P1.04 22.02,35 C4.1
  Top Layer w0.5: v1(30.2,35) 30.227,35 30.327,35.1 R6.2 31.65,35.275 32.625,36.25 34.261,36.25 34.607,35.904 34.607,35.193 37.2,32.6 v1(37.2,29.5)
  Bottom Layer w0.5: P1.04 27.05,31.85 v1(30.2,35) ; v1(37.2,29.5) 44.1,29.5 48.1,25.5 58.35,25.5 SW4.1
GPIO36: P1.01 R7.2 | length 10.5
  Top Layer w0.5: R7.2 12.677,30.737 P1.01
GPIO39: P1.02 R8.2 | length 49.8
  Top Layer w0.5: P1.02 21.43,36.95 53.45,36.95 57.523,32.877 R8.2
IO0: P2.09
NetD1_2: D1.2 R7.1 | length 21.3
  Top Layer w0.5: D1.2 8,44.7 8,26.9 9.481,25.419 10.704,25.419 R7.1
NetD2_2: D2.2 R8.1 | length 21.5
  Top Layer w0.5: R8.1 59.477,24.602 62.05,27.175 62.05,42.9 61.7,43.25 D2.2
NetD3_2: D3.2 R9.1 | length 21.3
  Top Layer w0.5: D3.2 8.15,2.75 8.15,4.55 7.7,5 7.7,19.875 10.423,22.598 R9.1@10.423,22.7
NetD4_2: D4.2 R10.1 | length 20.3
  Top Layer w0.5: R10.1 59.477,21.798 62.05,19.225 62.05,5.1 61.7,4.75 D4.2
SPI_CLK: P2.06 P4.4 | length 34.4
  Top Layer w0.3: P4.4 38.3,10.1 41.6,10.1 48.3,16.8 48.3,28.3 50.6,30.6 52.2,30.6 53.49,29.31 P2.06
SPI_CS: P2.05 P4.8 | length 38.2
  Top Layer w0.3: P4.8 29.4,9.2 33.8,9.2 36,11.4 40.9,11.4 46.9,17.4 v1(46.9,28)
  Bottom Layer w0.3: v1(46.9,28) 49.82,28 P2.05
SPI_MISO: P2.03 P4.5 | length 33.7
  Top Layer w0.3: P4.5 37,10.8 41.3,10.8 47.6,17.1 47.6,28.4 51.05,31.85 P2.03
SPI_MOSI: P2.02 P4.3 | length 37.9
  Top Layer w0.3: P4.3 39.7,9.5 41.9,9.5 48.9,16.5 48.9,26.8 50.1,28 54.4,28 54.9,28.5 54.9,33.16 P2.02
pads on no net: SW1. SW1.2 SW1.4 SW2. SW2.2 SW2.4 SW3. SW3.2 SW3.4 SW4. SW4.2 SW4.4 U1.1 U1.2 U1.3 U1.4 U1.5 U1.8 U1.11 U1.12 U1.13 U1.14 U1.15 U1.16 U1.17 U1.18

## Polygon pours and split planes (outlines as drawn)
GND on Bottom Layer "GND_L02_P000" (solid, remove dead copper, pour order 0): 0.8,46.3 17.1,46.3 20,43.4 50.5,43.4 53.1,46 69.1,46 69.1,0.8 0.8,0.8
GND on Top Layer "GND_L01_P001" (solid, remove dead copper, pour order 1): 0.8,0.8 0.8,46.3 17.1,46.3 20,43.4 50.5,43.4 53.1,46 69.1,46 69.1,0.8

## Silkscreen, mask and mechanical layers (free items; w line width, h text height)
Top Overlay:
  lines w0.2: 34.2,43 34.7,43.5 ; 34.7,41.9 34.7,43.5 ; 35.2,43 34.7,43.5
  text "TOP" at 32.834,39.954 h1.4
  text "TOP / module" at 46.048,5.7 h1.2
  text "Smart IoT Wallswitch / CO2/RH/T + buttons" at 19.612,2.9 h1.2
Bottom Overlay:
  lines w0.254: 26.5,7 26.5,26 43.5,26 43.5,7 ; 36,25.5 36,42.1
  text "JLCJLCJLCJLC" at 58.4,30.6 h1 r90
  text "CC1101 / M105 module" at 41.352,15.2 h1.2
Mechanical 4:
  circle w0.127: c23.9,40.4 r3
  circle w0.127: c50.3,3.5 r3
  circle w0.127: c19.7,3.5 r3
  circle w0.127: c46.1,40.4 r3
  circle w0.127: c52.4,39.9 r3
  circle w0.127: c52.4,11.5 r3
  circle w0.127: c17.6,11.5 r3
  circle w0.127: c17.6,39.9 r3
  circle w0.127: c5,24 r3
  circle w0.127: c65,24 r3
Dimensions:
  circle w0.254: c35,24 r37
  circle w0.254: c35,24 r29
  lines w0.254: 0,44 0,0 70,0 70,44 ; 0,47 70,47 ; 5,-6 5,64 ; 10.5,-6 10.5,54 ; 17.5,14 52.5,14 ; 17.5,41 52.5,41 ; 59.5,-6 59.5,54 ; 65,-6 65,64 ; -5,-16 75,-16 75,64 -5,64 -5,-16 ; 14.5,6.5 17.5,3.5 52.5,3.5 55.5,6.5 55.5,41.5 52.5,44.5 17.5,44.5 14.5,41.5 14.5,6.5
Board Shape:
  the board outline again, w0.1

## Dimensions
70,0 to 70,47 on Dimensions
0,47 to 70,47 on Dimensions
72,24 to 66.3,41.7 on Dimensions
-5,-16 to -5,64 on Dimensions
-5,64 to 75,64 on Dimensions
5,64 to 65,64 on Dimensions